# Altium PCB FT232_USB_8DAQ.PcbDoc (part 1 of 3)
Units mil, origin at the board's own origin, x right, y up, seen from the top; angles counter-clockwise.
Board outline 5020 x 4715 mil, 2 copper layers (Top Layer, Bottom Layer); 100 components, 0 nets, 361 pads, 148 vias.
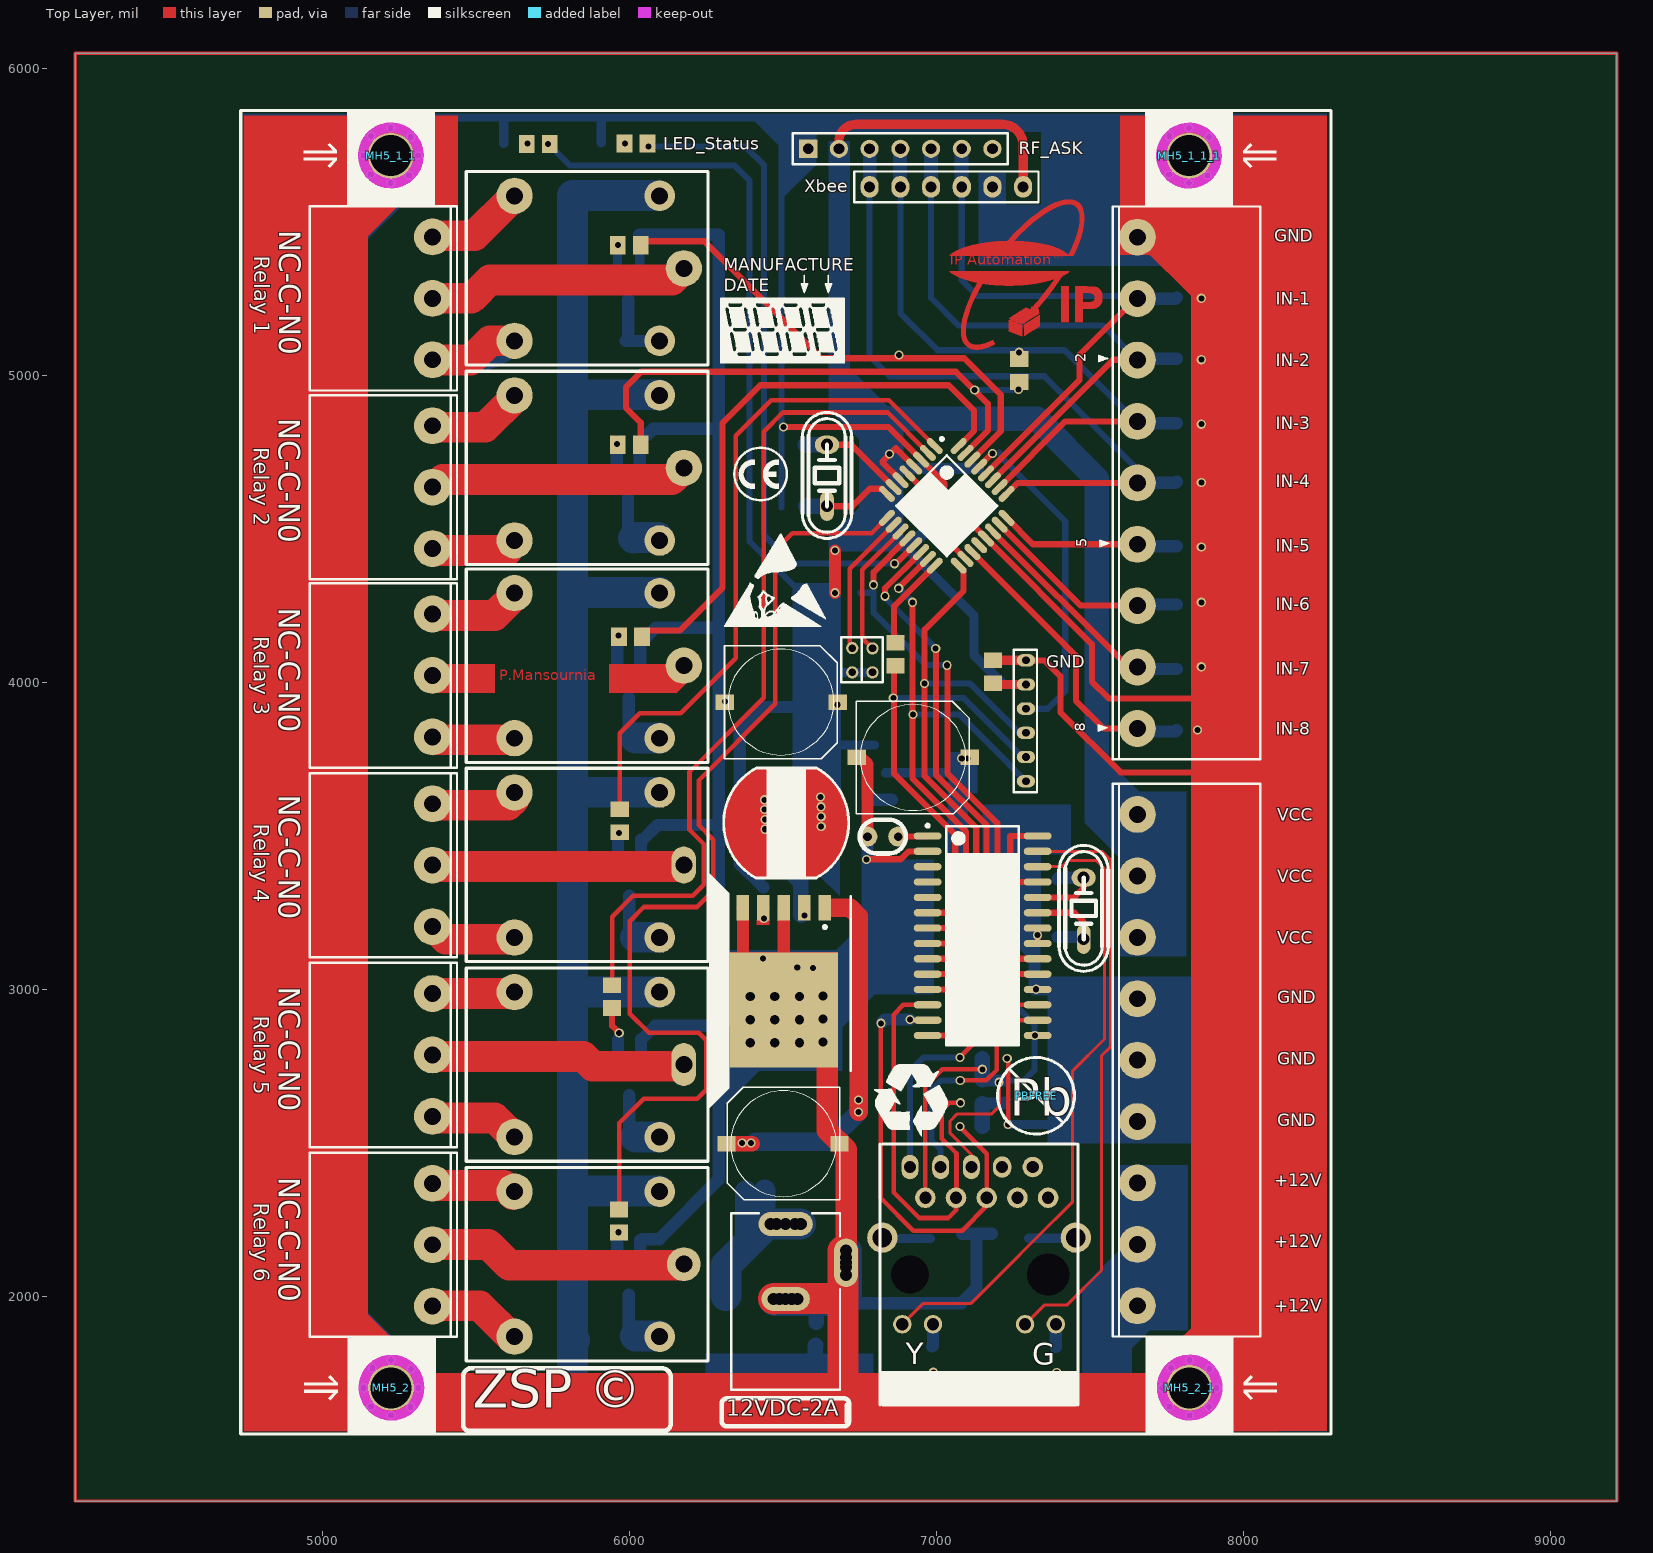
[diagram p0: Top Layer view]
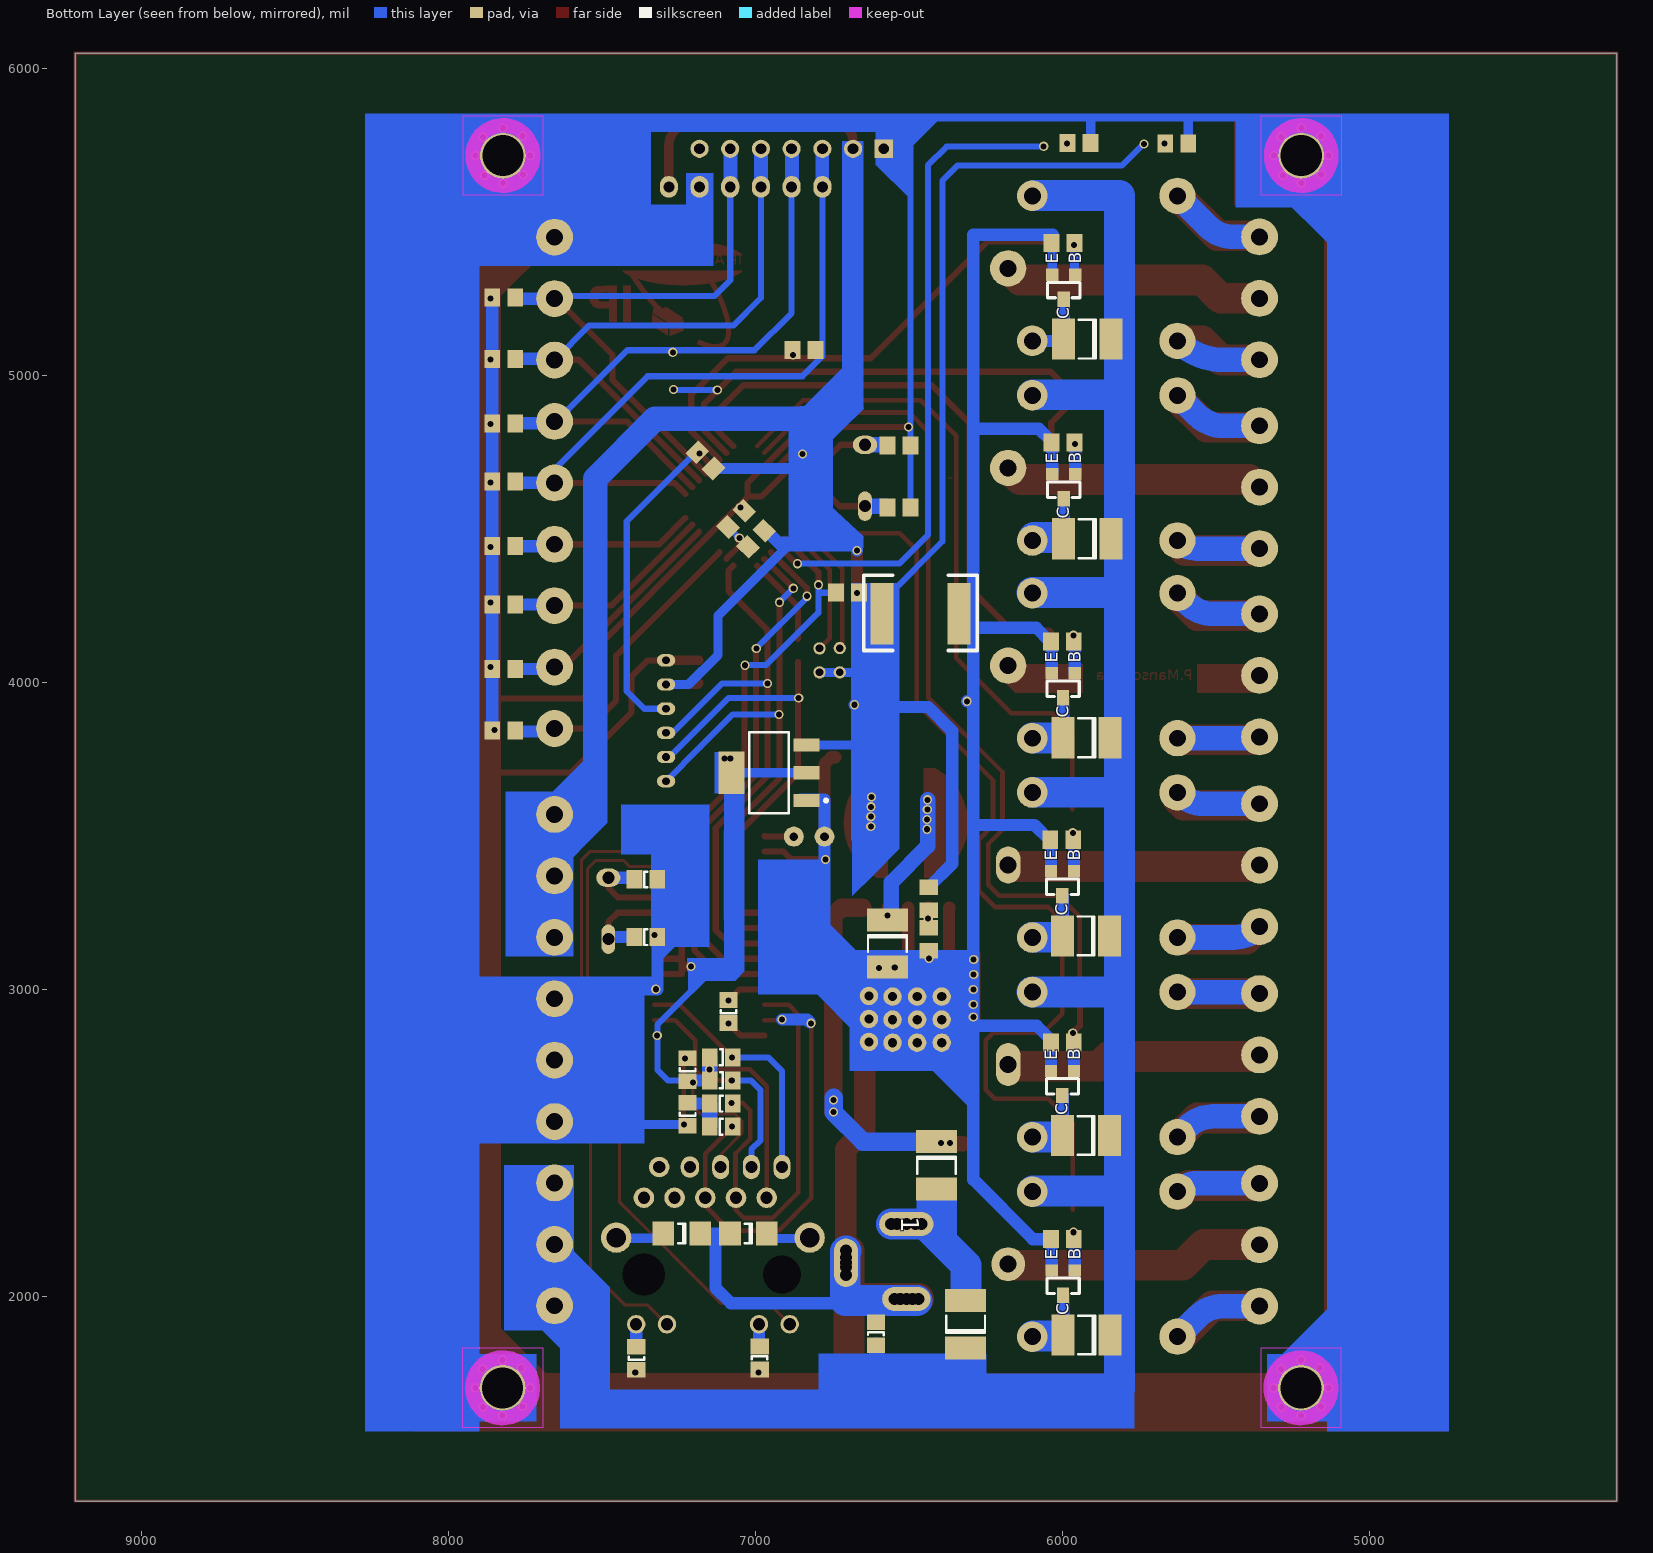
[diagram p1: Bottom Layer view, seen from below]

## Layer stack, top to bottom
Top Solder: solder mask 0.4, Solder Resist, Dk 3.5
Top Layer: signal copper 1.4
Dielectric 1: dielectric 12.6, FR-4, Dk 4.8
Bottom Layer: signal copper 1.4
Bottom Solder: solder mask 0.4, Solder Resist, Dk 3.5

## Board outline
4195,1335 9215,1335 9215,6050 4195,6050

## Design rules (kind name [scope] priority, off if disabled: settings)
Clearance [All] p1: gap=10
PolygonConnect [All] p1: connectstyle=Relief reliefconductorwidth=10 reliefentries=4 polygonreliefangle="90 Angle" airgapwidth=10
RoutingVias [All] p1: holewidth=28 width=50 viastyle="Through Hole" minholewidth=28 minwidth=50 maxholewidth=28 maxwidth=50
SolderMaskExpansion [All] p1: expansion=4
UnpouredPolygon [All] p1: allowunpoured=FALSE
Width [All] p1: maxlimit=10 minlimit=10 preferedwidth=10
29 further rules are at their usual default settings.

## Components (designator, comment, footprint, x,y, rotation, side; value= is the part's Value field where it differs from the comment)
1 "Comment" 1812 6315.3,1910.86 r90 bottom
C3 "100nF" C805 7221.3,2739.86 r90 bottom
C4 "100nF" C805 7221.3,2594.86 r90 bottom
L3 "Bead" BEAD 7023,2206 r0 bottom
L4 "Bead" BEAD 7240,2206 r0 bottom
MH5_1_1 "MOUNTING HOLE 3MM" MOUNTING_HOLE_3MM 5222.3,5716.86 r180 top (schematic designator MH3)
MH5_1_1_1 "MOUNTING HOLE 3MM" MOUNTING_HOLE_3MM 7822.3,5716.86 r180 top (schematic designator MH3)
MH5_2 "MOUNTING HOLE 3MM" MOUNTING_HOLE_3MM 5223.3,1703.86 r0 top (schematic designator MH3)
MH5_2_1 "MOUNTING HOLE 3MM" MOUNTING_HOLE_3MM 7823.3,1703.86 r0 top (schematic designator MH3)
PBFREE "" LEAD_FREE_S 7324,2655 r0 top
R1 "220R" C805 7388,1800 r90 bottom
R2 "49.9R" C805 7111.3,2704.86 r0 bottom
R3 "49.9R" C805 7356.7,3172.14 r180 bottom
R3 "49.9R" C805 7356.7,3360.14 r180 bottom
R3 "49.9R" C805 7088.14,2929.3 r90 bottom
R3 "49.9R" C805 7111.3,2779.86 r0 bottom
R6 "49.9R" C805 7111.3,2629.86 r180 bottom
R7 "49.9R" C805 7111.3,2554.86 r180 bottom
R10 "220R" C805 6986,1801 r270 bottom
R10 "220R" C805 6607.3,1879.86 r270 bottom
? "Comment" 2012[0805] 7184,4036 r270 top
? "Comment" 2012[0805] 7269,5017 r270 top
? "Comment" 2012[0805] 6842,5084 r180 bottom
? "Comment" PROG 7312,5615 r180 top
? "Comment" HDR1X7 6582,5739 r0 top
? "Comment" 2012[0805] 7819.3,3844.86 r0 bottom
? "Comment" 2012[0805] 7819.3,4044.86 r0 bottom
? "Comment" 2012[0805] 7819.3,4254.86 r0 bottom
? "Comment" 2012[0805] 7819.3,4444.86 r0 bottom
? "Comment" 2012[0805] 7819.3,4654.86 r0 bottom
? "Comment" 2012[0805] 7819.3,4844.86 r0 bottom
? "Comment" 2012[0805] 7819.3,5054.86 r0 bottom
? "Comment" 2012[0805] 7819.3,5254.86 r0 bottom
? "Comment" 2012[0805] 7163,4724 r225 bottom
? "Comment" 2012[0805] 6532.3,4570.86 r0 bottom
? "Comment" 2012[0805] 6532.3,4772.86 r0 bottom
? "Comment" X2P 6643,4675 r90 top
? "Comment" 2012[0805] 6998,4469 r315 bottom
? "Comment" 2012[0805] 7063,4534 r315 bottom
? "Comment" 2012[0805] 6700,4294 r180 bottom
? "Comment" 2012[0805] 5628,5756 r0 bottom
? "Comment" 2012[0805] 5946,5758 r180 bottom
? "Comment" 2012[0805] 6021,5756 r0 top
? "Comment" 2012[0805] 5703,5755 r0 top
? "Comment" 2012[0805] 6866,4093 r270 top
? "Comment" Cap_SMD_F10 7108,3755 r180 top
? "Comment" Cap_Ceramic 6775,3499 r0 top
? "Comment" Phonix-9 7654,3571 r270 top
? "Comment" Phonix-9 7654,5451 r270 top
? "Comment" 32A_N 7033,4576 r315 top
? "Comment" 1812 5919.3,5118.86 r0 bottom
? "Comment" Reley#1 5871.3,5352.86 r270 top
? "Comment" Phonix-3 5358.3,5051.86 r90 top
? "Comment" SMD-tr 5958.3,5328.86 r90 bottom
? "Comment" 2012[0805] 5998.3,5431.86 r0 bottom
? "Comment" 2012[0805] 5999.3,5424.86 r180 top
? "Comment" 2012[0805] 5966.3,2246.86 r270 top
? "Comment" 2012[0805] 5943.3,2977.86 r270 top
? "Comment" 2012[0805] 5968.3,3550.86 r270 top
? "Comment" 2012[0805] 6003.3,4149.86 r180 top
? "Comment" 2012[0805] 5999.3,4774.86 r180 top
? "Comment" LM2576 6502.3,3100.86 r180 top
? "Comment" 1812 6410.3,2428.86 r270 bottom
? "Comment" SOT223 6956,3707 r90 bottom
? "Comment" 1812 5921.3,1875.86 r0 bottom
? "Comment" SMD-tr 5960.3,2085.86 r90 bottom
? "Comment" 2012[0805] 6000.3,2188.86 r0 bottom
? "Comment" 1812 5923.3,2525.86 r0 bottom
? "Comment" SMD-tr 5962.3,2735.86 r90 bottom
? "Comment" 2012[0805] 6000.3,2828.86 r0 bottom
? "Comment" 1812 5923.3,3175.86 r0 bottom
? "Comment" SMD-tr 5962.3,3385.86 r90 bottom
? "Comment" 2012[0805] 6002.3,3488.86 r0 bottom
? "Comment" 1812 5921.3,3820.86 r0 bottom
? "Comment" SMD-tr 5960.3,4030.86 r90 bottom
? "Comment" 2012[0805] 6000.3,4133.86 r0 bottom
? "Comment" 2012[0805] 5998.3,4781.86 r0 bottom
? "Comment" SMD-tr 5958.3,4678.86 r90 bottom
? "Comment" Phonix-3 5358.3,4436.86 r90 top
? "Comment" Reley#1 5871.3,4702.86 r270 top
? "Comment" Phonix-3 5358.3,3823.86 r90 top
? "Comment" Phonix-3 5358.3,3205.86 r90 top locked
? "Comment" Phonix-3 5358.3,2587.86 r90 top locked
? "Comment" Phonix-3 5358.3,1969.86 r90 top locked
? "Comment" Reley#2 5871.3,2759.86 r270 top locked
? "Comment" Reley#3 5871.3,3409.86 r270 top
? "Comment" Reley#1 5871.3,4058.86 r270 top
? "Comment" power 6508.3,1697.86 r90 top locked
? "Comment" 1812 5919.3,4468.86 r0 bottom
? "Comment" X2P 7479,3265 r90 top
? "Comment" Cap_SMD_F10 6316.3,2500.86 r0 top
? "Comment" Cap_SMD_F10 6678.3,3934.86 r180 top
? "Comment" 2220 6337.3,4224.86 r0 bottom
? "Comment" 1812 6570.3,3150.86 r270 bottom
? "Comment" 2012[0805] 6435.3,3296.86 r270 bottom
? "Comment" 2012[0805] 6435.3,3164.86 r270 bottom
? "Comment" SOIC-SO28_N 7150,3176 r0 top
? "Comment" Reley#4 5871.3,2109.86 r270 top
? "Comment" RJ000002 6911.3,2070.86 r0 top locked
? "Comment" Self 6393.3,3539.86 r0 top

## Footprints (in the part's own frame and the unit in brackets; to place one, negate y for a bottom-side part, rotate by r counter-clockwise, add the part's x,y. Pads: shape width x height; smd on the part's side, far side on the other; paste and mask are expansions set on the pad)
32A_N [mm] "Thin QFP, 32-Leads, Body 7x7mm, Pitch 0.8mm, IPC Medium Density"
  oval 1.65x0.55 smd: 1(-4.2,2.8) 2(-4.2,2) 3(-4.2,1.2) 4(-4.2,0.4) 5(-4.2,-0.4) 6(-4.2,-1.2) 7(-4.2,-2) 8(-4.2,-2.8) 17(4.2,-2.8) 18(4.2,-2) 19(4.2,-1.2) 20(4.2,-0.4) 21(4.2,0.4) 22(4.2,1.2) 23(4.2,2) 24(4.2,2.8)
  oval 0.55x1.65 smd: 9(-2.8,-4.2) 10(-2,-4.2) 11(-1.2,-4.2) 12(-0.4,-4.2) 13(0.4,-4.2) 14(1.2,-4.2) 15(2,-4.2) 16(2.8,-4.2) 25(2.8,4.2) 26(2,4.2) 27(1.2,4.2) 28(0.4,4.2) 29(-0.4,4.2) 30(-1.2,4.2) 31(-2,4.2) 32(-2.8,4.2)
  silkscreen extent -4.32,-2.95 2.95,3.75, body extent -3.5,-3.5 3.5,3.5, height 1.2
1812 [mm] "Chip Capacitor; Body 4.5 x 3.2 mm (LxW typ)"
  rect 1.9x3.4 smd: 1(-1.95,0) 2(1.95,0)
  silkscreen extent -0.7,-1.6 0.7,1.6
2012[0805] [mm] "Chip Resistor; Body 2.0 x 1.3 mm (LxW typ)"
  rect 1.3x1.5 smd: 1(-0.95,0) 2(0.95,0)
2220 [mil]
  rect 75x200 smd: GND(0,0) VCC(250,0)
  silkscreen extent -60,-125 310,120
BEAD [mm]
  rect 1.8x2 smd: 1(-1.524,0) 2(1.524,0)
  silkscreen extent -0.3,-0.8 0.3,0.8
C805 [mm]
  rect 1.3x1.5 smd: 1(-0.95,0) 2(0.95,0)
  silkscreen extent -0.13,-0.67 0.13,0.64
Cap_Ceramic [mil]
  round 65 hole 28: 1(0,0) 2(100,0)
  silkscreen extent -25,-55 125,55
Cap_SMD_F10 [mm]
  rect 1.5x1.3 smd: 1(0,-0.051) 2(9.347,-0.051)
  silkscreen extent 0.05,-4.7 9.37,4.62, body extent 0.32,-4.43 9.08,4.33, height 10
HDR1X7 [mm]
  rect 1.5x1.5 hole 0.9: 1-GND(0,0)
  round 1.5 hole 0.9: 2-+5V(2.54,0) 3-10(5.08,0) 4-11(7.62,0) 5-12(10.16,0) 6-13(12.7,0) 7-VT(15.24,0)
  silkscreen extent -1.27,-1.27 16.51,1.27
LEAD_FREE_S [mil]
  silkscreen extent -125,-125 125,125
LM2576 [mm]
  rect 1.05x2.1 smd: 1(-3.4,-4.225) 2(-1.7,-4.225) 3(0,-4.225) 4(1.7,-4.225) 5(3.4,-4.225)
  rect 9x9.5 smd: 6(0,4.225)
  silkscreen extent -5.55,-5.17 5.55,9.28, body extent -5.65,-5.38 5.65,9.38, height 2
MOUNTING_HOLE_3MM [mm] "Non-plated mounting hole for 3mm screw"
  round 3.8 hole 3.4 mask+0.2: MOUNT(0,0)
  Top Layer circle w1: c0,0 r2.3
  Top Layer region: -2.8,-2.8 2.8,-2.8 2.8,2.8 -2.8,2.8
  Top Layer keep-out region: -3.3,-3.3 3.3,-3.3 3.3,3.3 -3.3,3.3
  Bottom Layer region: -2.8,-2.8 2.8,-2.8 2.8,2.8 -2.8,2.8
  Bottom Layer keep-out region: -3.3,-3.3 3.3,-3.3 3.3,3.3 -3.3,3.3
  Keep-Out Layer circle w1.2: c0,0 r2.5
Phonix-3 [mil]
  round 120 hole 55: 1(0,0) 2(200,0) 3(400,0)
  silkscreen extent -100,-80 500,400
Phonix-9 [mil]
  round 120 hole 55: 1(0,0) 2(200,0) 3(400,0) 4(600,0) 5(800,0) 6(1000,0) 7(1200,0) 8(1400,0) 9(1600,0)
  silkscreen extent -100,-80 1700,400
power [mm] "DC Power Jack, 2.5mm, KLD Series, PCB Mount"
  round 1.5 hole 1: 0(7.5,-0.508) 0(7.5,0) 0(7.5,0.508) 0(10.16,-5) 0(10.922,-5) 0(13.7,-0.762) 0(13.7,0.762) 1(13.7,0) 1A(13.7,-1.25) 1B(13.7,1.25) 2(10.5,-5) 2A(7.5,-1) 2B(7.5,1) 3A(9.5,-5) 3B(11.5,-5)
  oval 2x4.5 all layers, no hole: 1(13.7,0)
  oval 2x4 all layers, no hole: 2(7.5,0)
  oval 4x2 all layers, no hole: 3(10.5,-5)
  silkscreen extent 0,-4.5 14.6,4.5
PROG [mm] "Programer"
  oval 1.5x1.8 hole 0.9: GND(3.302,0) RST(5.842,0) SCK(8.382,0) TX(10.922,0) VCC_+5V(0.762,0)
  oval 1.5x1.8 hole 0.9 mask+0.102: RX(13.462,0)
  silkscreen extent -0.51,-1.27 14.73,1.27
Reley#1 [mm]
  round 3 hole 1.4: 11(0.084,7.761) 13(-5.916,-6.239) 14(6.084,-6.239)
  round 2.54 hole 1.4: 12(-5.916,5.761) 15(6.084,5.761)
  silkscreen extent -7.92,-10.24 8.08,9.76
Reley#2 [mm]
  oval 3.556x2.032 hole 1.4: 11(0.084,7.761)
  round 2.54 hole 1.4: 12(-5.916,5.761) 15(6.084,5.761)
  round 3 hole 1.4: 13(-5.916,-6.239) 14(6.084,-6.239)
  silkscreen extent -7.92,-10.24 8.08,9.76
Reley#3 [mm]
  oval 3.048x2.032 hole 1.4: 11(0.084,7.761)
  round 2.54 hole 1.4: 12(-5.916,5.761) 15(6.084,5.761)
  round 3 hole 1.4: 13(-5.916,-6.239) 14(6.084,-6.239)
  silkscreen extent -7.92,-10.24 8.08,9.76
Reley#4 [mm]
  round 2.794 hole 1.4: 11(0.084,7.761)
  round 2.54 hole 1.4: 12(-5.916,5.761) 15(6.084,5.761)
  round 3 hole 1.4: 13(-5.916,-6.239) 14(6.084,-6.239)
  silkscreen extent -7.92,-10.24 8.08,9.76, body extent -7.92,-10.24 8.08,9.76, height 18
RJ000002 [mil] "LAN 10/100BASE T Power over Ethernet RJ45 Jack  With Magnetic + LED module for RoHS process"
  oval 55x80 hole 39.37: 1-TD+(2,352) 3-TD-(102,352) 5-RCT(202,352)
  round 66.93 hole 39.37: 2-TCT(52,252) 4-RD+(152,252) 6-RD-(252,252) 8-VC-(352,252) 9-VC+(402,352) 10-VC-(452,252)
  oval 60x70 hole 39.37: 7-VC+(302,352)
  round 60 hole 39.37: 11(-23,-160) 12-GND(77,-160) 13(377,-160) 14-GND(477,-160)
  round 98.43 hole 62.99: 15(-88,122) 15(542,122)
  round 0 hole 125: ""(2,2)
  round 0 hole 137.8: ""(452,2)
  silkscreen extent -95,-423 549,427, body extent -100,-428 554,432, height 591
Self [mil]
  Top Layer region: 57,-173 22,-173 22,-176 57,-176
  Top Layer region: 177,180 212,180 212,183 177,183
  Top Layer region: 57,-173 17,-173 -25,-131 -63,-87 -81,-16 -77,39 -62,91 -26,139 22,182 58,182
  Top Layer region: 177,180 217,180 259,138 297,94 315,23 311,-32 296,-84 260,-132 212,-175 176,-175
  Top Layer lines w9.45: 22.11,177.36 ccw(c118,3.19) 23.58,-171.77 ; 210.42,178.77 cw(c116,3.81) 211.89,-170.36
  silkscreen extent -87,-176 321,184
SMD-tr [mil]
  rect 40x40 smd: 1(0,0) 2(0,75)
  rect 50x40 smd: 3(-80,38)
  silkscreen extent -75,-15 -25,90
SOIC-SO28_N [mm] "SOIC, 28-Leads, Body 17.9x7.5mm, Pitch 1.27mm, IPC Medium Density"
  oval 2.3x0.6 smd: 1(-4.55,8.255) 2(-4.55,6.985) 3(-4.55,5.715) 4(-4.55,4.445) 5(-4.55,3.175) 6-MISO(-4.55,1.905) 7-MOSI(-4.55,0.635) 8-SCK(-4.55,-0.635) 9-SS(-4.55,-1.905) 10-PB.0(-4.55,-3.175) 11(-4.55,-4.445) 12-Tpin-(-4.55,-5.715) 13-Tpin+(-4.55,-6.985) 14(-4.55,-8.255) 15(4.55,-8.255) 16-tpout-(4.55,-6.985) 17=Tpout+(4.55,-5.715) 18(4.55,-4.445) 19(4.55,-3.175) 20(4.55,-1.905) 21(4.55,-0.635) 22(4.55,0.635) 23(4.55,1.905) 24(4.55,3.175) 25(4.55,4.445) 26(4.55,5.715) 27(4.55,6.985) 28(4.55,8.255)
  silkscreen extent -4.67,-9.05 3,9.23, body extent -3.8,-9.06 3.8,9.06, height 2.65
SOT223 [mm] "SOT-223/SC-73; 4 Leads; Body 6.7 x 7.3 mm, inc. leads (LxW max)"
  rect 1.1x2.15 smd: 1GND(-2.3,-3.1) 2-OUT(0,-3.1) 3IN(2.3,-3.1)
  rect 3.5x2.15 smd: 4(0,3.1)
  silkscreen extent -3.35,-4.85 3.35,1.63
X2P [mm]
  oval 2.427x1.143 hole 1: 1(-2.54,0)
  oval 1.5x2 hole 1: 2(2.54,0)
  silkscreen extent -5.21,-2.03 5.21,2.03

## Part data
C3 C4: library part Cap, "Capacitor"
L3 L4: library part Inductor, "Inductor"
MH5_1_1 MH5_1_1_1 MH5_2 MH5_2_1: library part D-001-0001, "Mounting Hole, M3 Screw, Plated, Square Pad"
R1 R2 R3 R3 R3 R3 R6 R7 R10 R10: library part Res1, "Resistor"
?: library part ATmega8-16AC
?: library part ENC28J60-I/SO

## Free pads (board coordinates)
  round 60 hole 30: 0(6393.3,2827.86) 0(6393.3,2902.86) 0(6393.3,2977.86) 0(6473.3,2827.86) 0(6473.3,2902.86) 0(6473.3,2977.86) 0(6553.3,2827.86) 0(6553.3,2902.86) 0(6553.3,2977.86) 0(6630.47,2830.22) 0(6630.47,2905.22) 0(6630.47,2980.22)
  round 40 hole 25: gnd(6725.22,4112.85) gnd(6791.22,4111.85) vcc(6725.22,4033.85) vcc(6791.22,4033.85)
  oval 60x40 hole 25: GND(7291,4073) MISO(7291,3758.04) MOSI(7291,3679.3) RST(7291,3915.52) SCK(7291,3836.78) VCC(7291,3994.26)

## Via types
v1: diameter 30, hole 19.68, Top Layer to Bottom Layer, tented both sides, 81 vias
v2: diameter 23.62, hole 11.81, Top Layer to Bottom Layer, 32 vias
v3: diameter 30, hole 19.68, Top Layer to Bottom Layer, 20 vias
v4: diameter 30, hole 19.68, Top Layer to Bottom Layer, tented top, 15 vias

## Nets (pads, with @x,y where several pads share a name; then routed paths per layer and width w, separated by ;. In a path a pad name is that pad's centre, name@x,y a point inside that pad or via, vN(x,y) a via of type N, cw(c..) or ccw(c..) an arc to the next point about the centre after c; other vN are vias at no path point)
pads on no net: 1.1 1.2 ?. ?.0 ?.1 ?.1-GND ?.1-TD+ ?.1A ?.1B ?.1GND ?.2 ?.2-+5V ?.2-OUT ?.2-TCT ?.2A ?.2B ?.3 ?.3-10 ?.3-TD- ?.3A ?.3B ?.3IN ?.4 ?.4-11 ?.4-RD+ ?.5 ?.5-12 ?.5-RCT ?.6 ?.6-13 ?.6-MISO ?.6-RD- ?.7 ?.7-MOSI ?.7-VC+ ?.7-VT ?.8 ?.8-SCK ?.8-VC- ?.9 ?.9-SS ?.9-VC+ ?.10 ?.10-PB.0 ?.10-VC- ?.11 ?.12 ?.12-GND ?.12-Tpin- ?.13 ?.13-Tpin+ ?.14 ?.14-GND ?.15 ?.16 ?.16-tpout- ?.17 ?.17=Tpout+ ?.18 ?.19 ?.20 ?.21 ?.22 ?.23 ?.24 ?.25 ?.26 ?.27 ?.28 ?.29 ?.30 ?.31 ?.32 ?.GND ?.RST ?.RX ?.SCK ?.TX ?.VCC ?.VCC_+5V C3.1 C3.2 C4.1 C4.2 L3.1 L3.2 L4.1 L4.2 MH5_1_1.MOUNT MH5_1_1_1.MOUNT MH5_2.MOUNT MH5_2_1.MOUNT R1.1 R1.2 R2.1 R2.2 R3.1 R3.2 R6.1 R6.2 R7.1 R7.2 R10.1 R10.2